# Altium PCB BBTC-PSU.PcbDoc
Units mil, origin at the board's own origin, x right, y up, seen from the top; angles counter-clockwise.
Board outline 4523.62 x 2577.95 mil, 2 copper layers (Top Layer, Bottom Layer); 40 components, 28 nets, 122 pads, 36 vias.
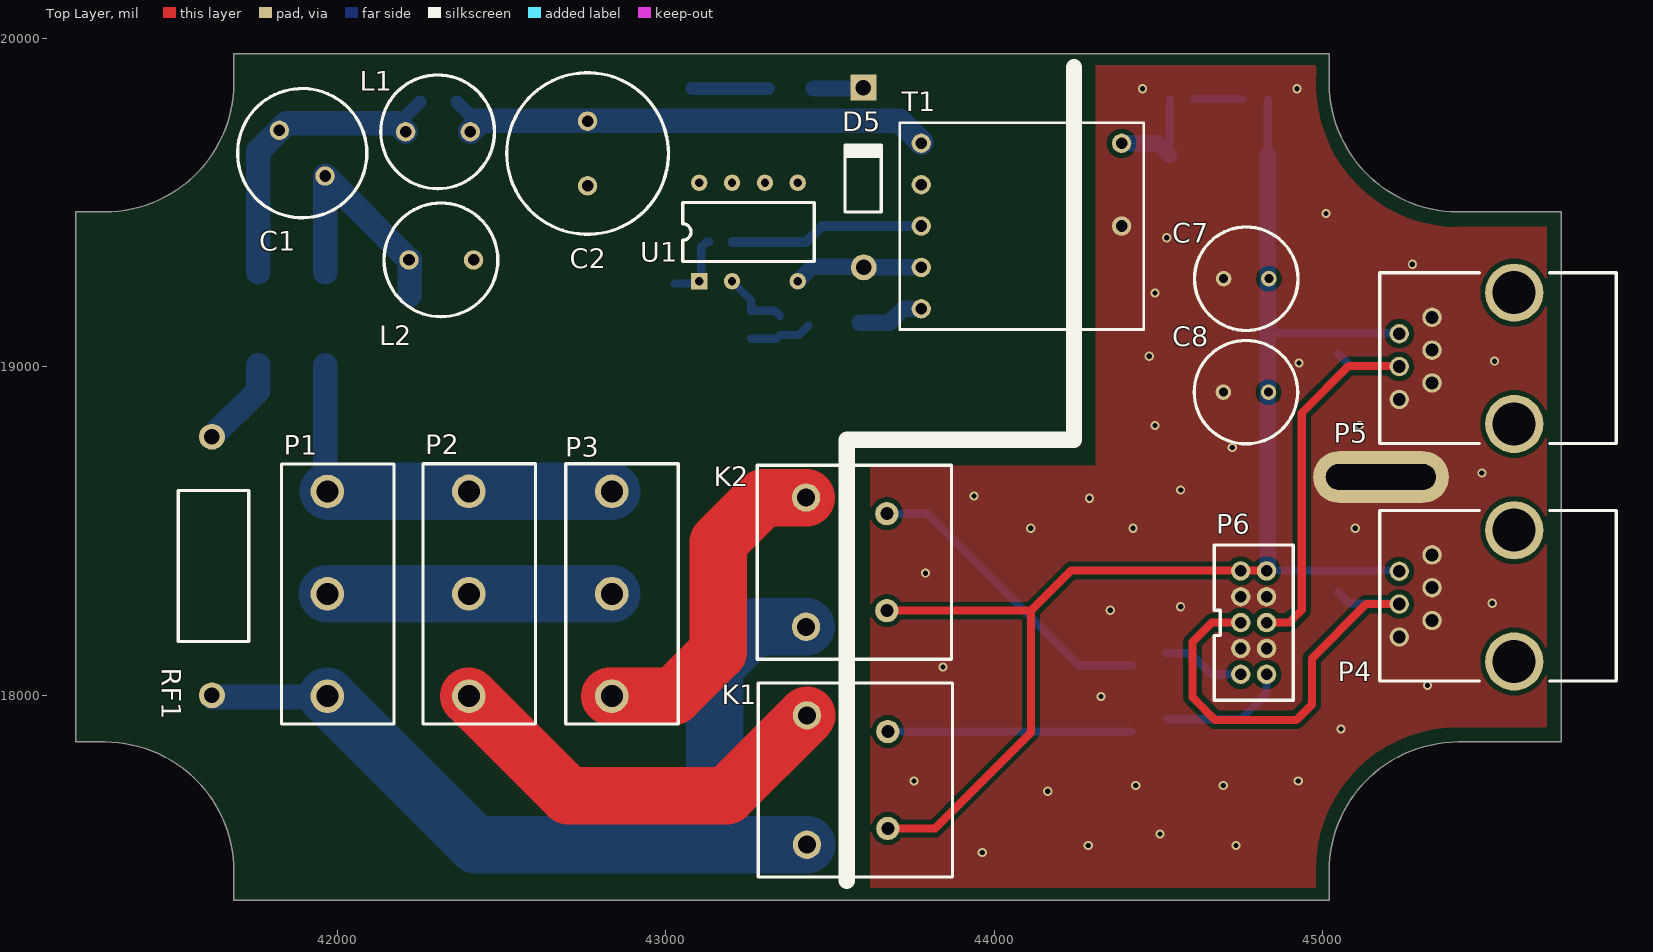
[diagram p0: Top Layer view]
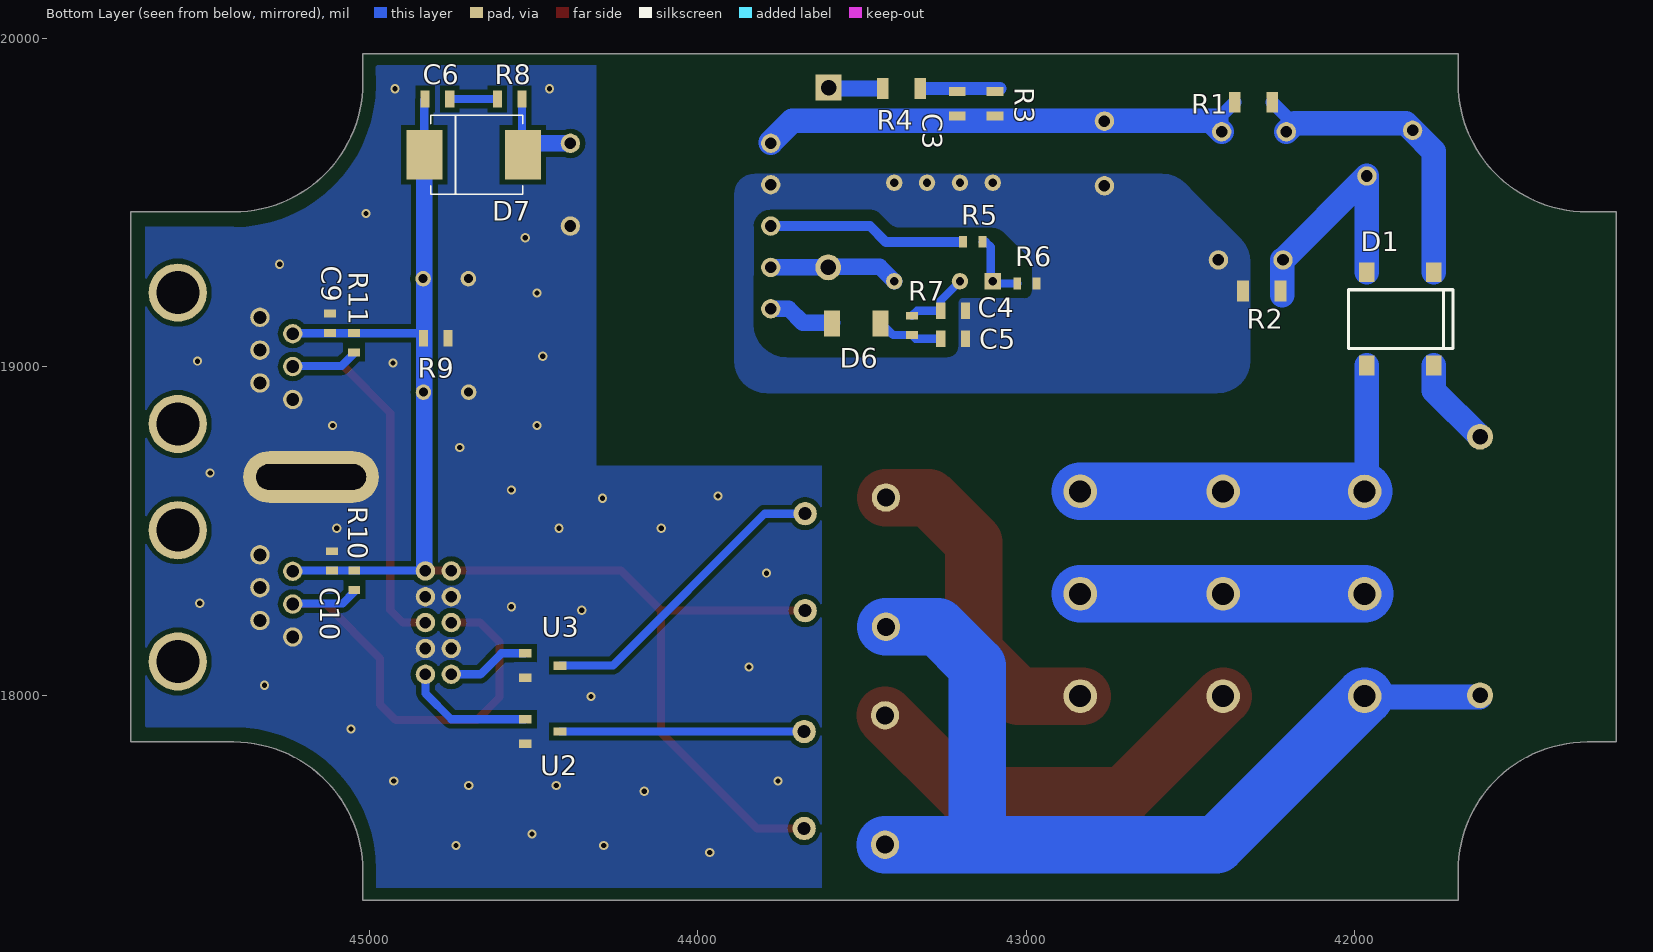
[diagram p1: Bottom Layer view, seen from below]

## Layer stack, top to bottom
Top Layer: signal copper 1.4
Dielectric: dielectric 12.6, FR-4, Dk 4.8
Bottom Layer: signal copper 1.4

## Board outline
41685,17376 41685,17464.19 ccw(c41291.3,17464.19) 41291.3,17857.89 41203.11,17857.89 41203.11,19472.06 41291.3,19472.06 ccw(c41291.3,19865.76) 41685,19865.76 41685,19953.95 45020.04,19953.95 45020.04,19865.76 ccw(c45413.74,19865.76) 45413.74,19472.06 45726.73,19472.06 45726.73,17857.89 45413.74,17857.89 ccw(c45413.74,17464.19) 45020.04,17464.19 45020.04,17376

## Design rules (kind name [scope] priority, off if disabled: settings)
Clearance [All] p1: gap=15
HoleSize [All] p1: absolutevalues=TRUE maxlimit=250 minlimit=10 maxpercent=80.000 minpercent=20.000
MinimumAnnularRing [All] p1: minimumring=6
MinimumSolderMaskSliver [All] p1: minsoldermaskwidth=3
PolygonConnect [All] p1: connectstyle=Direct reliefconductorwidth=10 reliefentries=4 polygonreliefangle="90 Angle"
RoutingVias [All] p1: holewidth=28 width=50 viastyle="Through Hole" minholewidth=28 minwidth=50 maxholewidth=28 maxwidth=50
SilkscreenOverComponentPads [All] p1: minsilkscreentomaskgap=10
SolderMaskExpansion [All] p1: expansion=4
Width [All] p1: maxlimit=250 minlimit=10 preferedwidth=10
25 further rules are at their usual default settings.

## Components (designator, comment, footprint, x,y, rotation, side; value= is the part's Value field where it differs from the comment)
C1 "4.7uF" CAP-10D-5L 41893,19651 r315 top
C2 "10uF" CAP-12.5D-5L 42762,19650 r270 top
C3 "1nF" 0805 43210,19801 r90 bottom
C4 "1uF" 0805 43223,19171 r180 bottom
C5 "10uF" 0805 43223,19086 r180 bottom
C6 "2.2nF" 0805 44793,19816 r180 bottom
C7 "470uF" CAP-8D-3.5L 44767.72,19268.7 r180 top
C8 "470uF" CAP-8D-3.5L 44766.73,18923.23 r180 top
C9 "Cap" 0603 45120.08,19132.87 r270 bottom
C10 "Cap" 0603 45114.17,18409.45 r270 bottom
D1 "Bridge2" DF1510S-E3/77 41861.22,19146.65 r0 bottom
D5 "Diode 1N4007" DIODE-WIDE 43601,19569 r90 top
D6 "LL4148" SOD-80 43518,19132 r180 bottom
D7 "SL44" DIODE_SMC 44683,19646 r180 bottom
K1 "Relay-SPST" PB134005 43676.18,17742.13 r180 top
K2 "Relay-SPST" PB134005 43673.23,18405.51 r180 top
L1 "1.5mH" TSL0808 42208,19716 r0 top
L2 "1.5mH" TSL0808 42218,19326 r0 top
P1 "AC_IN" B3P-VH(LF)(SN) 41969.49,18309.06 r90 top
P2 "AC_OUT_1" B3P-VH(LF)(SN) 42400.59,18309.24 r90 top
P3 "AC_OUT_2" B3P-VH(LF)(SN) 42835.63,18309.24 r90 top
P4 "ONEWIRE_1" "CONN MOD JACK R/A 6P6C" 45583.66,18502.95 r0 top locked
P5 "ONEWIRE_2" "CONN MOD JACK R/A 6P6C" 45583.66,19226.38 r0 top locked
P6 "MAIN_BRD" "5X2 PIN PTH HEADER - 2MM" 44750.98,18221.46 r0 top
R1 "10K" 1206 42308,19806 r0 bottom
R2 "10K" 1206 42283,19231 r0 bottom
R3 "470K" 0805 43095,19801 r270 bottom
R4 "300" 1206 43380,19848 r180 bottom
R5 "14.7K" 0603 43163,19381 r180 bottom
R6 "9.76K" 0603 42998,19254 r180 bottom
R7 "6.2K" 0603 43348,19126.47 r90 bottom
R8 "100" 0805 44573,19816 r180 bottom
R9 "1.2K" 0805 44798.23,19087.6 r180 bottom
R10 "Res2" 0603 45046.26,18350.39 r90 bottom
R11 "Res2" 0603 45047.24,19073.82 r90 bottom
RF1 "10" "Res Wide" 41618.11,18393.7 r90 top
T1 "CWS-T1-RDR158" CWS-T1-RDR158 43778,19681 r0 top
U1 "LNK616PG" LNK6XX 43102,19261 r90 top
U2 "DRDC3105F" SOT23 44525.59,17889.76 r270 bottom
U3 "DRDC3105F" SOT23 44525.59,18090.55 r270 bottom

## Footprints (in the part's own frame and the unit in brackets; to place one, negate y for a bottom-side part, rotate by r counter-clockwise, add the part's x,y. Pads: shape width x height; smd on the part's side, far side on the other; paste and mask are expansions set on the pad)
"5X2 PIN PTH HEADER - 2MM" [mm]
  round 1.5 hole 0.9: 1(0,4) 2(2,4) 3(0,2) 4(2,2) 5(0,0) 6(2,0) 7(0,-2) 8(2,-2) 9(0,-4) 10(2,-4)
  silkscreen extent -2.05,-6 4.05,6
0603 [mm]
  rect 0.6x0.9 smd: 1(-0.75,0) 2(0.75,0)
0805 [mm]
  rect 0.7x1.3 smd: 1(-0.95,0) 2(0.95,0)
1206 [mm] "SMT Device"
  rect 0.9x1.6 smd: 1(-1.45,0) 2(1.45,0)
B3P-VH(LF)(SN) [mm] "CONN HEADER VH TOP 3POS 3.96MM"
  round 2.6 hole 1.7: 1(-7.92,0) 2(0,0) 3(7.92,0)
  silkscreen extent -10.07,-5.15 10.05,3.55
CAP-8D-3.5L [mm] "Electrolytic 8mm Diameter 3.5mm Lead Spacing"
  round 1.2 hole 0.7: 1(-1.75,0) 2(1.75,0)
  silkscreen extent -4,-4 4,4
CAP-10D-5L [mm] "Electrolytic 10mm Diameter 5mm Lead Spacing"
  round 1.5 hole 0.9: 1(-2.5,0) 2(2.5,0)
  silkscreen extent -5,-5 5,5
CAP-12.5D-5L [mm] "Electrolytic 12.5mm Diameter 5mm Lead Spacing"
  round 1.5 hole 0.9: 1(-2.5,0) 2(2.5,0)
  silkscreen extent -6.25,-6.25 6.25,6.25
"CONN MOD JACK R/A 6P6C" [mm] "RJ11 Jack"
  round 1.5 hole 1: 1(-8.89,-8.26) 2(-6.35,-6.99) 3(-8.89,-5.72) 4(-6.35,-4.45) 5(-8.89,-3.18) 6(-6.35,-1.91)
  round 4.5 hole 3.33: ""(0,-10.16) ""(0,0)
  silkscreen extent -10.4,-11.68 7.9,1.53
CWS-T1-RDR158 [mm]
  round 1.5 hole 0.9: 1(0,0) 2(0,-3.2) 3(0,-6.4) 4(0,-9.6) 5(0,-12.8) 8(15.5,-6.4) 10(15.5,0)
  silkscreen extent -1.67,-14.4 17.2,1.6
DF1510S-E3/77 [mm] "BRIDGE RECTIFIER DIODE GPP 1.5A 1000V 4SMD"
  rect 1.2x1.52 smd: 1(-2.6,-3.61) 2(-2.6,3.61) 3(2.6,-3.61) 4(2.6,3.61)
  silkscreen extent -4.08,-2.25 4,2.3
DIODE-WIDE [mm] "Through Hole Diode Wide pitch"
  round 2 hole 1.2: 1(-6.75,-0.05)
  rect 2x2 hole 1.2: 2(7.15,-0.025)
  silkscreen extent -2.47,-1.43 2.7,1.4
DIODE_SMC [mil] "Diode; 2 Leads"
  rect 110x150 smd: 1(-150,0) 2(150,0)
  silkscreen extent -130,-120 150,120
LNK6XX [mil]
  rect 50x50 hole 25: 1(0,0)
  round 50 hole 25: 2(0,-100) 4(0,-300) 5(300,-300) 6(300,-200) 7(300,-100) 8(300,0)
  silkscreen extent 60,-350 240,50
PB134005 [mm] "SPST Relay"
  round 2.2 hole 1.4: 1(6.25,5) 2(6.25,-5)
  round 1.8 hole 1: 3(0,3.75) 4(0,-3.75)
  silkscreen extent -5,-7.5 10.02,7.5
"Res Wide" [mm]
  round 2 hole 1.2: 1(-10,0) 2(10,0)
  silkscreen extent -5.84,-2.85 5.84,2.6
SOD-80 [mm] "Mini-MELF"
  rect 1.25x2 smd: 1(-1.875,0) 2(1.875,0)
SOT23 [mm]
  rect 0.65x1 smd: 1(-0.95,0) 2(0.95,0) 3(0,2.7)
TSL0808 [mm]
  round 1.5 hole 0.9: 1(0,0) 2(5,0)
  silkscreen extent -1.92,-4.4 6.88,4.4

## Part data
C1 C2 C7 C8: library part "Cap Pol1", "Polarized Capacitor (Radial)"
C3 C4 C5 C6: library part Cap, "Capacitor"
C9 C10: "Capacitor"
D1: "Diode Bridge"
D5: "1 Amp General Purpose Rectifier"
D6: library part Diode, "Default Diode"
D7: library part "D Schottky", "Schottky Diode"
K1 K2: "Single-Pole Single-Throw Relay"
L1 L2: library part Inductor, "Inductor"
P1 P2 P3: library part "Header 3", "Header, 3-Pin"
P4 P5: library part "Header 6", "Header, 6-Pin"
P6: library part "Header 5X2", "Header, 5-Pin, Dual row"
R1 R2 R3 R4 R5 R6 R7 R8 R9 RF1: library part Res1, "Resistor"
R10 R11: "Resistor"
T1: "Flyback transformer"
U1: "Energy-Efficient, Accurate CV/CC Switcher  for Adapters and Chargers"
U2 U3: "INTEGRATED RELAY, INDUCTIVE LOAD DRIVER"

## Free pads (board coordinates)
  oval 413.39x157.48 hole 78.74 slot 334.65 at 0 deg: 0(45177.91,18664.98)

## Via types
v1: diameter 28, hole 16, Top Layer to Bottom Layer, 36 vias

## Nets (pads, with @x,y where several pads share a name; then routed paths per layer and width w, separated by ;. In a path a pad name is that pad's centre, name@x,y a point inside that pad or via, vN(x,y) a via of type N, cw(c..) or ccw(c..) an arc to the next point about the centre after c; other vN are vias at no path point)
5V: C6.1 C7.1 C8.1 C9.2 C10.2 D7.1 K1.3 K2.3 P4.5 P5.5 P6.1 P6.2 R9.1 R10.2 R11.2 | length 4371.6
  Top Layer w25: K2.3 44112.2,18257.87 ; K1.3 43819.88,17594.49 44112.2,17886.81 44112.2,18257.87 ; P6.2@44832.68,18379.92 44234.25,18379.92 44112.2,18257.87
  Bottom Layer w25: P6.2@44832.68,18379.9 P4.5@45233.54,18379.9 ; D7.1 C6.1@44833,19813.4 ; R9.1@44834.65,19102.9 P5.5@45233.54,19102.9
  Bottom Layer w50: P6.2@44832.68,18379.92 44833,18380.24 D7.1
GND: C7.2 C8.2 C9.1 C10.1 P4.1 P4.2 P4.4 P4.6 P5.1 P5.2 P5.4 P5.6 P6.3 P6.4 P6.7 P6.8 pad.0 R9.2 T1.8 U2.2 U3.2
  other v1: 43963.58,17521.65 44286.42,17542.32 44736.22,17542.32 44504.92,17577.76 44163.39,17707.68 44431.1,17725.39 44697.83,17725.39 43755.91,17739.17 44926.18,17739.17 45056.1,17897.64 44325.79,17996.06 45319.88,18030.51 43844.49,18086.61 44353.35,18258.86 44567.91,18269.69 45516.73,18280.51 43791.34,18372.05 44111.22,18508.86 44423.23,18508.86 45099.41,18508.86 44290.35,18600.39 43938.98,18607.28 44567.91,18625 45485.24,18677.17 44725.39,18754.92 44490.16,18821.85 45112.2,18821.85 44928.15,19011.81 45523.62,19017.72 44472.44,19032.48 44490.16,19225.39 45273.62,19312.99 44525.59,19393.7 45010.83,19467.52 44451.77,19847.44 44922.24,19847.44
IN_G: P1.2 P2.2 P3.2 | length 866.1
  Bottom Layer w175: P1.2@41969.49,18309.24 P3.2
IN_L: K1.1 K2.1 P1.1 RF1.1 | length 2867.3
  Bottom Layer w75: RF1.1@41619.09,17995.08 P1.1@41967.32,17995.08
  Bottom Layer w175: P1.1 42421.46,17545.28 43149.61,17545.28 ; K2.1 43268.7,18208.66 43149.61,18089.57 43149.61,17545.28 ; K1.1 43149.61,17545.28
IN_N: D1.4 P1.3 P2.3 P3.3 | length 1168.9
  Bottom Layer w75: 41963.58,18698.81 D1.4
  Bottom Layer w175: P1.3@41972.44,18621.06 P3.3
NetC1_1: C1.1 D1.1 L1.1 R1.1 | length 923.6
  Bottom Layer w40: 42208,19763.09 R1.1
  Bottom Layer w75: D1.1 41758.86,19656.05 C1.1 41844.93,19742.13 42181.87,19742.13 L1.1
NetC1_2: C1.2 D1.3 L2.1 R2.1 | length 761.3
  Bottom Layer w75: D1.3@41962.6,19288.78 C1.2 L2.1 ; R2.1@42220.91,19218.5 L2.1@42220.91,19326
NetC2_1: C2.1 C3.1 L1.2 R1.2 R3.2 T1.1 | length 1561.1
  Bottom Layer w40: R1.2 42421.66,19749.43 ; L1.2 42404.85,19766.24
  Bottom Layer w75: L1.2 42438.28,19749.43 ; 42421.66,19749.43 43712.17,19749.43 T1.1@43778,19683.6
NetC2_2: C2.2 C4.2 C5.2 L2.2 R2.2 R6.2 T1.2 U1.5 U1.6 U1.7 U1.8
NetC3_2: C3.2 R3.1 R4.2 | length 233
  Bottom Layer w40: R3.1@43080,19848 R4.2@43313,19848
NetC4_1: C4.1 R7.2 U1.2 | length 208
  Bottom Layer w25: U1.2 43260.4,19202.6 C4.1 43333,19171 R7.2
NetC5_1: C5.1 D6.2 R7.1 | length 191
  Bottom Layer w25: C5.1 43337.06,19086 R7.1 43405.13,19096.94 D6.2@43434.65,19126.47
NetC6_2: C6.2 R8.1 | length 145.2
  Bottom Layer w25: R8.1 C6.2
NetD1_2: D1.2 RF1.2 | length 275.4
  Bottom Layer w75: RF1.2 41758.86,18928.15 D1.2
NetD5_1: D5.1 T1.4 U1.4 | length 392.2
  Bottom Layer w50: U1.4 43446.09,19305.09 D5.1@43598,19305.09 ; D5.1@43600.05,19303.05 T1.4
NetD5_2: D5.2 R4.1 | length 150.5
  Bottom Layer w50: R4.1@43451,19848 D5.2@43601.48,19848
NetD6_1: D6.1 T1.5 | length 204.6
  Bottom Layer w50: D6.1@43590.82,19135 43681,19135 43723.06,19177.06 T1.5
NetD7_1: D7.2 R8.2 T1.10 | length 326.7
  Bottom Layer w25: D7.2@44535.6,19648.6 R8.2
  Bottom Layer w50: T1.10 44498,19681 D7.2
NetR5_1: R5.1 T1.3 | length 595.4
  Bottom Layer w30: R5.1@43202.53,19381 43428,19381 43476.03,19429.03 T1.3
NetR5_2: R5.2 R6.1 U1.1 | length 223.9
  Bottom Layer w25: R6.1 43108,19254 43108,19365.53 43123.47,19381 R5.2
OUT_L_1: K1.2 P2.1 | length 1256
  Top Layer w175: P2.1 42703.14,17694.88 43186.02,17694.88 K1.2
OUT_L_2: K2.2 P3.1 | length 1042.9
  Top Layer w175: P3.1@42829.72,17997.43 43024.01,17997.43 43159.45,18132.87 43159.45,18465.55 43296.26,18602.36 K2.2
OW1: P4.3 P6.5 R10.1 | length 1425.6
  Top Layer w25: P6.5 44663.39,18221.46 44604.33,18162.4 44604.33,17994.09 44673.23,17925.2 44920.28,17925.2 44967.52,17972.44 44967.52,18112.2 45133.07,18277.76 P4.3
  Bottom Layer w25: R10.1@45047.24,18313.98 45081.32,18279.9 P4.3@45233.54,18279.9
OW2: P5.3 P6.6 R11.1 | length 1281.2
  Top Layer w25: P6.6 44898.62,18221.46 44936.81,18259.65 44936.81,18409.74 44937.01,18409.94 44937.01,18709.74 44936.81,18709.94 44936.81,18860.04 45079.67,19002.9 P5.3@45233.54,19002.9
  Bottom Layer w25: R11.1@45047.24,19040.35 45084.7,19002.9 P5.3@45233.54,19002.9
R1: K1.4 U2.3 | length 743.1
  Bottom Layer w25: K1.4 U2.3
R1_CTL: P6.10 U2.1 | length 394.8
  Bottom Layer w25: U2.1 44750.98,17927.17 44829.72,18005.91 P6.10
R2: K2.4 U3.3 | length 937.7
  Bottom Layer w25: K2.4 43796.26,18553.15 44258.86,18090.55 U3.3
R2_CTL: P6.9 U3.1 | length 251.9
  Bottom Layer w25: U3.1 44598.43,18127.95 44662.4,18063.98 P6.9
pads on no net: P4. P5.

## Polygon pours and split planes (outlines as drawn)
NetC2_2 on Bottom Layer "Bottom Layer-No Net 1" (solid, pour order 5): 43421,19588 43827,19588 cw(c43827,19526) 43889,19526 43889,19020 cw(c43789,19020) 43789,18920 43696,18920 42418,18920 cw(c42418,19020) 42318,19020 42318,19272 42318,19319.58 cw(c42418,19319.58) 42347.29,19390.29 42485,19528 42515.71,19558.71 cw(c42586.42,19488) 42586.42,19588 43421,19588
GND on Bottom Layer "Bottom Layer-No Net 1" (solid, pour order 2): 43622.05,17414.37 43622.05,18698.82 44309.06,18698.82 44309.06,19918.31 44980.32,19918.31 44980.32,19859.25 ccw(c45413.39,19859.25) 45413.39,19426.18 45683.07,19426.18 45683.07,17902.56 45412.4,17902.56 ccw(c45412.4,17469.49) 44979.33,17469.49 44979.33,17414.37
GND on Top Layer "Bottom Layer-No Net 1" (solid, pour order 5): 43622.05,17414.37 43622.05,18698.82 44309.06,18698.82 44309.06,19918.31 44980.32,19918.31 44980.32,19859.25 ccw(c45413.39,19859.25) 45413.39,19426.18 45683.07,19426.18 45683.07,17902.56 45412.4,17902.56 ccw(c45412.4,17469.49) 44979.33,17469.49 44979.33,17414.37

## Other copper
Bottom Layer:
  pour cut-out: 43686.73,19478.29 43779.29,19478.29 cw(c43779.29,19428.58) 43829,19428.58 43829,19130 cw(c43729,19130) 43729,19030 43241,19030 cw(c43241,19064) 43207,19064 43207,19196 ccw(c43193,19196) 43193,19210 43006,19210 cw(c43006,19233) 42983,19233 42983,19297 cw(c43042.65,19297) 43000.47,19339.18 43072.06,19410.77 cw(c43104,19378.83) 43104,19424 43382.79,19424 ccw(c43382.79,19475.21) 43419,19439 43449.51,19469.51 cw(c43470,19449.03) 43470,19478 43686.44,19478

## Silkscreen, mask and mechanical layers (free items; w line width, h text height)
Top Overlay:
  lines w50: 43551.18,17435.04 43551.18,18778.54 44243.11,18778.54 44243.11,19912
Mechanical 13:
  the board outline again, w10
Mechanical 15:
  lines w10: 43622.05,17414.37 43622.05,18698.82 44309.06,18698.82 44309.06,19918.31 44980.32,19918.31 44980.32,19859.25 ccw(c45413.39,19859.25) 45413.39,19426.18 45683.07,19426.18 45683.07,17902.56 45412.4,17902.56 ccw(c45412.4,17469.49) 44979.33,17469.49 44979.33,17414.37 44309.06,17414.37 43622.05,17414.37